# Altium PCB R6.PcbDoc (part 2 of 2)
Units mm, origin at the board's own origin, x right, y up, seen from the top; angles counter-clockwise.
Board outline 152.4 x 101.6 mm, 4 copper layers (Top Layer, GND, VDD, Bottom Layer), stack 0.925 mm thick; 92 components, 126 nets, 416 pads, 248 vias.
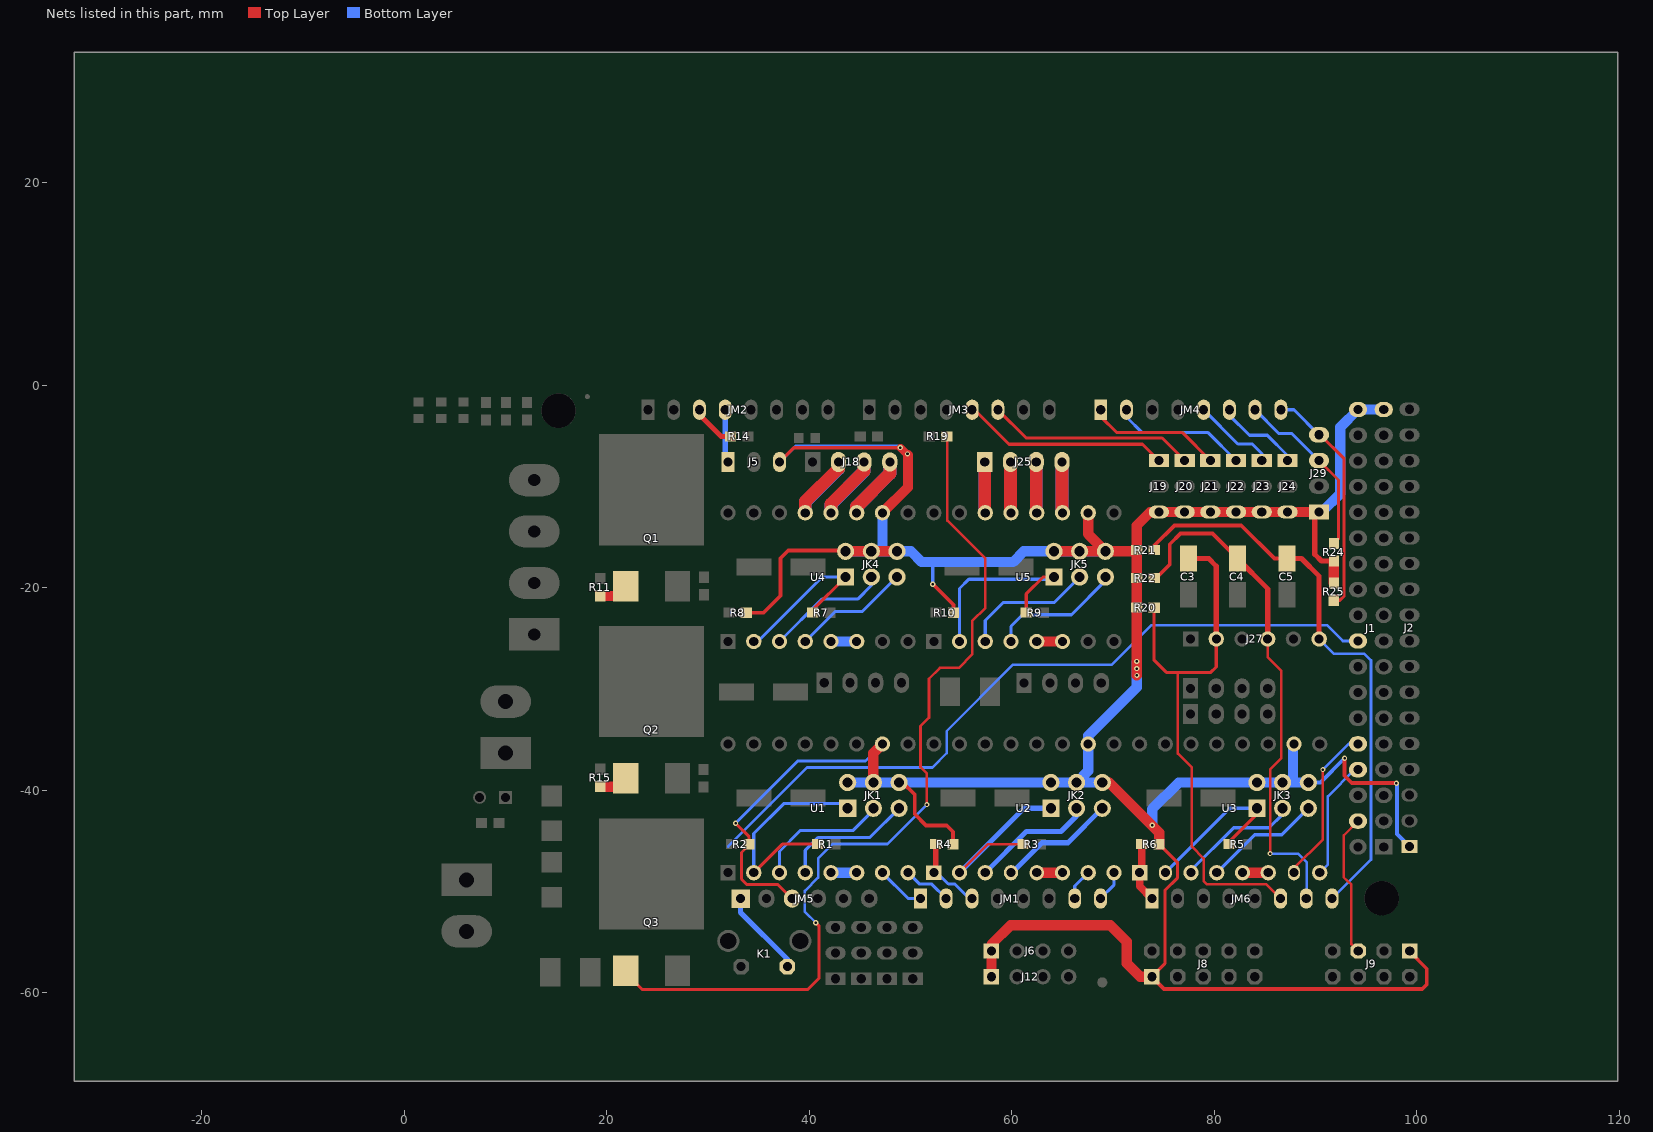
[diagram p4: the nets of this part, all layers, seen from the top]

## Via types
v1: diameter 0.508, hole 0.254, Top Layer to Bottom Layer, 152 vias
v2: diameter 1.016, hole 0.508, Top Layer to Bottom Layer, 96 vias

## Nets (pads, with @x,y where several pads share a name; then routed paths per layer and width w, separated by ;. In a path a pad name is that pad's centre, name@x,y a point inside that pad or via, vN(x,y) a via of type N, cw(c..) or ccw(c..) an arc to the next point about the centre after c; other vN are vias at no path point) (continued)
NetJ18_2: J18.2 U4.13 | length 12.7
  Top Layer w1.27: U4.13@39.601,-12.612 39.601,-11.502 42.875,-8.228 J18.2@42.875,-7.595
  Bottom Layer w1.27: U4.13@39.601,-12.612 39.601,-11.555 42.875,-8.28 J18.2@42.875,-7.595
NetJ18_3: J18.3 U4.12 | length 12.7
  Top Layer w1.27: U4.12@42.141,-12.612 42.141,-11.749 45.415,-8.475 J18.3@45.415,-7.595
  Bottom Layer w1.27: U4.12@42.141,-12.612 42.141,-11.783 45.415,-8.509 J18.3@45.415,-7.595
NetJ18_4: J18.4 U4.11 | length 12.7
  Top Layer w1.27: U4.11@44.681,-12.612 44.681,-12.006 47.955,-8.732 J18.4@47.955,-7.595
  Bottom Layer w1.27: U4.11@44.681,-12.612 44.681,-12.012 47.955,-8.738 J18.4@47.955,-7.595
NetJ25_1: J25.1 U5.14 | length 10.1
  Top Layer w1.27: J25.1@57.328,-7.595 57.328,-12.559 U5.14@57.381,-12.612
  Bottom Layer w1.27: J25.1@57.328,-7.595 57.328,-12.559 U5.14@57.381,-12.612
NetJ25_2: J25.2 U5.13 | length 10.1
  Top Layer w1.27: J25.2@59.868,-7.595 59.868,-12.559 U5.13@59.921,-12.612
  Bottom Layer w1.27: J25.2@59.868,-7.595 59.868,-12.559 U5.13@59.921,-12.612
NetJ25_3: J25.3 U5.12 | length 10.1
  Top Layer w1.27: J25.3@62.408,-7.595 62.408,-12.559 U5.12@62.461,-12.612
  Bottom Layer w1.27: J25.3@62.408,-7.595 62.408,-12.559 U5.12@62.461,-12.612
NetJ25_4: J25.4 U5.11 | length 10.1
  Top Layer w1.27: J25.4@64.948,-7.595 64.948,-12.559 U5.11@65.001,-12.612
  Bottom Layer w1.27: J25.4@64.948,-7.595 64.948,-12.559 U5.11@65.001,-12.612
NetJK1_1: JK1.1 R1.1 U1.2 | length 22
  Top Layer w0.305: U1.2@34.521,-48.147 37.339,-45.329 R1.1@40.8,-45.329
  Bottom Layer w0.305: U1.2@34.521,-48.147 34.521,-44.276 37.471,-41.326 43.327,-41.326 JK1.1@43.79,-41.788
NetJK1_3: JK1.3 U1.3 | length 13.2
  Bottom Layer w0.305: U1.3@37.061,-48.147 37.061,-46.047 39.141,-43.967 44.348,-43.967 46.33,-41.986 JK1.3@46.33,-41.788
NetJK1_5: JK1.5 U1.4 | length 13.2
  Bottom Layer w0.305: U1.4@39.601,-48.147 39.601,-45.946 40.894,-44.653 46.004,-44.653 JK1.5@48.87,-41.788
NetJK2_1: JK2.1 R3.1 U2.2 | length 19.1
  Top Layer w0.254: U2.2@54.841,-48.147 57.659,-45.329 R3.1@61.12,-45.329
  Bottom Layer w0.508: U2.2@54.841,-48.147 61.2,-41.788 JK2.1@63.856,-41.788
NetJK2_3: JK2.3 U2.3 | length 12.1
  Bottom Layer w0.508: U2.3@57.381,-48.147 61.433,-44.094 64.85,-44.094 66.396,-42.549 JK2.3@66.396,-41.788
NetJK2_5: JK2.5 U2.4 | length 11.6
  Bottom Layer w0.508: U2.4@59.921,-48.147 60.007,-48.147 62.968,-45.187 65.537,-45.187 JK2.5@68.936,-41.788
NetJK3_1: JK3.1 R5.1 U3.2 | length 16.4
  Top Layer w0.305: R5.1@81.44,-45.329 81.483,-45.285 81.483,-45.085 84.201,-42.367 JK3.1@84.201,-41.788
  Bottom Layer w0.305: U3.2@75.161,-48.147 81.52,-41.788 JK3.1@84.201,-41.788
NetJK3_3: JK3.3 U3.3 | length 12.2
  Bottom Layer w0.305: U3.3@77.701,-48.147 77.701,-47.911 81.898,-43.713 85.395,-43.713 86.741,-42.367 JK3.3@86.741,-41.788
NetJK3_5: JK3.5 U3.4 | length 11.7
  Bottom Layer w0.305: U3.4@80.241,-48.147 83.989,-44.399 86.67,-44.399 JK3.5@89.281,-41.788
NetJK4_1: JK4.1 R7.1 U4.2 | length 16.9
  Top Layer w0.305: U4.2@34.521,-25.312 U4.2@34.521,-24.997 ; R7.1@40.342,-22.469 40.342,-22.197 JK4.1@43.586,-18.953
  Bottom Layer w0.305: U4.2@34.521,-25.312 34.915,-25.312 41.274,-18.953 JK4.1@43.586,-18.953
NetJK4_3: JK4.3 U4.3 | length 12.2
  Bottom Layer w0.305: U4.3@37.061,-25.312 41.24,-21.133 44.78,-21.133 46.126,-19.787 JK4.3@46.126,-18.953
NetJK4_5: JK4.5 U4.4 | length 12
  Bottom Layer w0.305: U4.4@39.601,-25.312 42.561,-22.352 45.237,-22.352 48.636,-18.953 JK4.5@48.666,-18.953
  Bottom Layer w0.508: U4.4@39.601,-25.312 U4.4@39.601,-25.017
NetJK5_1: JK5.1 R9.1 U5.2 | length 20.3
  Top Layer w0.305: R9.1@61.424,-22.469 61.424,-20.618 63.089,-18.953 JK5.1@64.16,-18.953
  Bottom Layer w0.305: U5.2@54.841,-25.312 54.841,-20.089 55.758,-19.172 63.942,-19.172 JK5.1@64.16,-18.953
NetJK5_3: JK5.3 U5.3 | length 13.2
  Bottom Layer w0.305: U5.3@57.381,-25.312 57.381,-23.239 59.157,-21.463 64.191,-21.463 JK5.3@66.7,-18.953
NetJK5_5: JK5.5 U5.4 | length 13
  Bottom Layer w0.305: U5.4@59.921,-25.312 59.921,-23.823 61.062,-22.682 65.888,-22.682 69.24,-19.329 JK5.5@69.24,-18.953
NetJM2_3: JM2.3 R14.1 | length 4.4
  Top Layer w0.508: JM2.3@29.159,-2.438 29.159,-2.921 31.31,-5.071 R14.1@32.214,-5.071
NetQ1_G: Q1.G R11.2 | length 2.9
  Top Layer w0.508: Q1.G@20.935,-20.828 Q1.G@21.882,-19.881
  Top Layer w1.016: R11.2@19.355,-20.828 Q1.G@20.935,-20.828
NetQ2_G: Q2.G R15.2 | length 2.9
  Top Layer w0.508: Q2.G@21.062,-39.649 Q2.G@21.882,-38.829
  Top Layer w1.016: R15.2@19.355,-39.649 Q2.G@21.062,-39.649
NetQ3_G: Q3.G R19.2 | length 88.7
  Top Layer w0.254: Q3.G@21.882,-57.828 Q3.G@21.882,-57.417 ; 50.986,-33.681 51.825,-32.842 51.825,-28.998 52.908,-27.915 54.762,-27.915 56.083,-26.594 56.083,-23.317 57.398,-22.003 57.398,-17.137 53.636,-13.375 53.636,-5.149 R19.2@53.569,-5.081 ; 50.986,-33.682 50.986,-37.733 51.619,-38.366 v1(51.619,-41.421)
  Top Layer w0.305: Q3.G@21.882,-57.828 21.882,-58.06 23.512,-59.69 39.853,-59.69 40.945,-58.598 40.945,-53.391 v1(40.64,-53.086)
  Bottom Layer w0.254: v1(40.64,-53.086) 39.573,-52.019 39.573,-49.936 40.869,-48.641 40.869,-46.736 42.291,-45.314 47.727,-45.314 v1(51.619,-41.421)
NetU1_5: U1.5 U1.6 | length 2.5
  Bottom Layer w1.016: U1.5@42.141,-48.147 U1.6@44.681,-48.147
NetU2_5: U2.5 U2.6 | length 2.5
  Top Layer w1.016: U2.5@62.461,-48.147 U2.6@65.001,-48.147
NetU3_5: U3.5 U3.6 | length 2.5
  Top Layer w1.016: U3.5@82.781,-48.147 U3.6@85.321,-48.147
NetU4_5: U4.5 U4.6 | length 2.5
  Bottom Layer w1.016: U4.5@42.141,-25.312 U4.6@44.681,-25.312
NetU5_5: U5.5 U5.6 | length 2.5
  Top Layer w1.016: U5.5@62.461,-25.312 U5.6@65.001,-25.312
PS-ON: J5.1 JM2.4 | length 5.3
  Bottom Layer w0.508: JM2.4@31.699,-2.438 31.699,-7.302 J5.1@31.991,-7.595
RESET: JM5.1 K1.2 | length 8.6
  Bottom Layer w0.508: JM5.1@33.223,-50.711 33.223,-52.078 37.846,-56.701 K1.2@37.846,-57.427
SCK: J1.4 J9.5 | length 14.1
  Top Layer w0.254: J1.4@94.135,-43.053 J1.4@94.183,-43.053 92.775,-44.461 92.775,-48.601 93.126,-48.951 93.143,-48.951 93.523,-49.332 93.523,-55.194 J9.5@94.209,-55.88
SCL: J29.4 JM4.8 R25.1 | length 23
  Top Layer w0.305: J29.4@90.322,-4.902 90.424,-4.902 92.812,-7.29 92.812,-20.828 92.387,-21.253 R25.1@91.786,-21.253
  Bottom Layer w0.305: JM4.8@86.563,-2.438 87.859,-2.438 J29.4@90.322,-4.902
SDA: J29.3 JM4.7 R24.1 | length 17.6
  Top Layer w0.305: J29.3@90.322,-7.442 92.253,-9.373 92.253,-15.206 R24.1@91.806,-15.654
  Bottom Layer w0.305: JM4.7@84.023,-2.438 86.376,-4.791 87.671,-4.791 J29.3@90.322,-7.442
"THE RM0": C3.1 J27.2 JM6.6 R20.1 | length 55
  Top Layer w0.254: 76.403,-28.372 76.403,-36.398 77.77,-37.765 77.77,-45.56 78.939,-46.73 78.939,-48.951 79.286,-49.298 85.137,-49.298 JM6.6@86.538,-50.698
  Top Layer w0.305: R20.1@74.059,-21.981 74.059,-27.171 75.26,-28.372 76.403,-28.372 79.654,-28.372 80.188,-27.838 J27.2@80.188,-25.07
  Top Layer w0.508: C3.1@77.432,-17.135 79.441,-17.135 80.188,-17.882 J27.2@80.188,-25.07
"THE RM1": C4.1 J27.4 JM6.7 R22.1 | length 51.2
  Top Layer w0.254: J27.4@85.268,-25.07 85.268,-26.869 86.589,-28.19 86.589,-36.855 85.508,-37.936 v1(85.508,-46.267)
  Top Layer w0.381: R22.1@74.059,-19.06 74.26,-19.06 75.59,-17.729 75.59,-15.723 76.657,-14.656 79.804,-14.656 C4.1@82.283,-17.135
  Top Layer w0.508: C4.1@82.283,-17.135 85.268,-20.119 J27.4@85.268,-25.07
  Bottom Layer w0.254: v1(85.508,-46.267) 88.265,-46.267 89.129,-47.13 89.129,-50.648 JM6.7@89.078,-50.698
"THE RM2": C5.1 J27.6 JM6.8 R21.1 | length 56.9
  Top Layer w0.381: R21.1@74.059,-16.291 74.059,-15.857 76.048,-13.868 82.658,-13.868 85.924,-17.135 C5.1@87.16,-17.135
  Top Layer w0.508: C5.1@87.16,-17.135 88.61,-17.135 90.348,-18.872 J27.6@90.348,-25.07
  Bottom Layer w0.254: J27.6@90.348,-25.07 91.811,-26.533 94.819,-26.533 95.466,-27.181 95.466,-46.85 JM6.8@91.618,-50.698
VCC: J1.35 J1.36 J2.1 J5.3 J6.1 J8.1 J9.1 J12.1 J19.3 J20.3 J21.3 J22.3 J23.3 J24.3 J29.1 JK1.2 JK1.4 JK1.6 JK2.2 JK2.4 JK2.6 JK3.2 JK3.4 JK3.6 JK4.2 JK4.4 JK4.6 JK5.2 JK5.4 JK5.6 JM5.3 R2.2 R4.2 R6.2 R8.2 R10.2 R20.2 R21.2 R22.2 R24.2 R25.2 U1.10 U2.10 U3.10 U4.10 U5.10 | length 361.6
  Top Layer w0.305: v1(32.722,-43.26) 32.722,-43.274 34.061,-44.613 R2.2@34.061,-45.339 34.061,-45.398 33.304,-46.155 33.304,-48.784 33.828,-49.308 36.9,-49.308 JM5.3@38.303,-50.711 ; J5.3@37.071,-7.595 38.478,-6.188 45.246,-6.188 ; JK1.2@43.683,-39.141 JK1.2@43.79,-39.248 ; 45.246,-6.191 49.004,-6.191 v1@49.102,-6.191 ; J8.1@73.825,-58.42 75.114,-57.131 75.114,-49.903 76.377,-48.64 76.377,-47.167 R6.2@74.549,-45.339
  Top Layer w0.381: R8.2@33.782,-22.479 35.484,-22.479 37.16,-20.803 37.16,-17.094 37.922,-16.332 43.505,-16.332 JK4.2@43.586,-16.413 ; JK1.6@48.87,-39.245 JK1.6@48.87,-39.248 49.223,-39.248 50.415,-40.441 50.415,-42.357 51.54,-43.482 53.579,-43.482 54.204,-44.107 R4.2@54.204,-45.339 ; v1@52.172,-19.634 v1(52.197,-19.66) 54.229,-21.692 R10.2@54.229,-22.479 ; J8.1@73.825,-58.42 75.044,-59.639 100.533,-59.639 100.974,-59.198 100.974,-57.63 99.289,-55.944 J9.1@99.289,-55.88 ; v1(92.868,-36.846) 92.839,-36.875 92.839,-38.582 93.563,-39.306 97.964,-39.306 v1(97.971,-39.314)
  Top Layer w0.508: v1(48.985,-6.172) v1@49.004,-6.191 ; J29.1@90.322,-12.522 90.31,-12.535 89.916,-12.929 89.916,-16.713 90.576,-17.374 R24.2@91.796,-17.374
  Top Layer w0.762: v1@49.004,-6.191 v1@49.751,-6.938
  Top Layer w1.016: JK4.2@43.586,-16.413 JK4.4@46.126,-16.413 JK4.6@48.666,-16.413 ; JK1.4@46.33,-39.248 46.33,-36.338 U1.10@47.221,-35.447 ; U4.10@47.221,-12.612 49.751,-10.083 v1@49.751,-6.938 ; J12.1@57.988,-58.42 J6.1@57.988,-55.88 57.988,-55.235 59.875,-53.348 69.73,-53.348 71.359,-54.978 71.359,-57.085 72.694,-58.42 J8.1@73.825,-58.42 ; JK5.2@64.16,-16.413 JK5.4@66.7,-16.413 JK5.6@69.24,-16.413 ; U5.10@67.541,-12.612 67.541,-14.714 JK5.6@69.24,-16.413 ; JK2.6@68.936,-39.248 69.609,-39.248 74.549,-44.188 R6.2@74.549,-45.339 ; v1(72.345,-28.671) 72.339,-28.665 v1(72.339,-27.28) R20.2@72.339,-21.971 R22.2@72.339,-19.05 R21.2@72.339,-16.281 ; J29.1@90.31,-12.535 J24.3@87.224,-12.535 J23.3@84.684,-12.535 J22.3@82.144,-12.535 J21.3@79.604,-12.535 J20.3@77.064,-12.535 J19.3@74.524,-12.535 73.673,-12.535 72.339,-13.868 R21.2@72.339,-16.281 ; R25.2@91.796,-19.533 R24.2@91.796,-17.374 ; JK5.6@69.24,-16.413 72.207,-16.413 R21.2@72.339,-16.281
  Bottom Layer w0.305: v1(32.722,-43.26) 38.863,-37.119 45.549,-37.119 U1.10@47.221,-35.447 ; J5.3@37.071,-7.595 38.657,-6.009 48.741,-6.009 v1@48.927,-6.195 ; v1(48.985,-6.172) 48.985,-6.204 v1@49.529,-6.748
  Bottom Layer w0.381: 52.172,-17.475 52.197,-17.501 v1(52.197,-19.66) ; JK3.6@89.281,-39.248 90.466,-39.248 v1(92.868,-36.846) ; v1(97.971,-39.314) 98.018,-39.36 98.018,-44.322 J2.1@99.263,-45.568
  Bottom Layer w0.508: J29.1@90.322,-12.522 90.322,-12.536 J29.1@90.37,-12.584
  Bottom Layer w1.016: JK4.2@43.586,-16.413 JK4.4@46.126,-16.413 47.219,-16.413 ; JK1.2@43.79,-39.248 JK1.4@46.33,-39.248 JK1.6@48.87,-39.248 JK2.2@63.856,-39.248 JK2.4@66.396,-39.248 ; U4.10@47.221,-12.612 47.221,-16.411 47.219,-16.413 ; JK2.6@68.936,-39.248 JK2.4@66.396,-39.248 ; JK5.6@69.24,-16.413 JK5.4@66.7,-16.413 JK5.2@64.16,-16.413 61.189,-16.413 60.127,-17.475 52.172,-17.475 51.105,-17.475 50.043,-16.413 JK4.6@48.666,-16.413 47.219,-16.413 ; v1@72.339,-27.356 72.339,-29.838 67.541,-34.636 U2.10@67.541,-35.447 67.541,-38.103 JK2.4@66.396,-39.248 ; v1(73.873,-43.465) 73.873,-41.852 76.477,-39.248 JK3.2@84.201,-39.248 JK3.4@86.741,-39.248 87.774,-39.248 ; U3.10@87.861,-35.447 87.774,-35.534 87.774,-39.248 ; JK3.6@89.281,-39.248 87.774,-39.248 ; J29.1@90.322,-12.522 90.629,-12.522 92.438,-10.713 92.438,-4.159 J1.36@94.183,-2.413 J1.35@96.723,-2.413
  other v1: 72.338,-27.991 49.696,-6.794
X-DIR: JM1.2 U1.8 | length 4.8
  Bottom Layer w0.305: U1.8@49.761,-48.147 50.897,-49.283 52.102,-49.283 JM1.2@53.518,-50.698
X-EN: J1.18 | length 73.2
  Bottom Layer w0.254: 31.981,-45.562 39.785,-37.758 52.163,-37.758 53.575,-36.346 53.575,-34.167 60.132,-27.61 69.875,-27.61 73.787,-23.698 91.11,-23.698 92.685,-25.273 J1.18@94.183,-25.273
X-MAX: J20.1 JM3.6 | length 20.5
  Top Layer w0.305: JM3.6@58.623,-2.438 61.417,-5.232 74.841,-5.232 J20.1@77.064,-7.455
X-MIN: J19.1 JM3.5 | length 20.5
  Top Layer w0.305: JM3.5@56.083,-2.438 56.312,-2.438 59.715,-5.842 72.911,-5.842 J19.1@74.524,-7.455
X-STEP: JM1.1 U1.7 | length 4.8
  Bottom Layer w0.305: U1.7@47.221,-48.147 49.773,-50.698 JM1.1@50.978,-50.698
Y-DIR: JM1.8 U2.8 | length 3.1
  Bottom Layer w0.305: JM1.8@68.758,-50.698 70.081,-49.375 U2.8@70.081,-48.147
Y-EN: JM1.3 R4.1 U2.1 | length 7.7
  Top Layer w0.508: U2.1@52.301,-48.147 52.484,-47.964 R4.1@52.484,-45.329
  Bottom Layer w0.305: U2.1@52.301,-48.147 52.62,-48.147 53.731,-49.257 54.363,-49.257 55.804,-50.698 JM1.3@56.058,-50.698
Y-MAX: J22.1 JM4.2 | length 13.3
  Bottom Layer w0.305: JM4.2@71.323,-2.438 71.323,-3.15 72.873,-4.699 79.388,-4.699 J22.1@82.144,-7.455
Y-MIN: J21.1 JM4.1 | length 13.3
  Top Layer w0.305: JM4.1@68.783,-2.438 68.783,-3.124 70.333,-4.674 76.822,-4.674 J21.1@79.604,-7.455
Y-STEP: JM1.7 U2.7 | length 3.1
  Bottom Layer w0.305: JM1.7@66.218,-50.698 66.218,-49.47 U2.7@67.541,-48.147
Z-DIR: J1.8 U3.8 | length 12.3
  Top Layer w0.254: U3.8@90.401,-48.147 U3.8@90.401,-47.8
  Bottom Layer w0.254: U3.8@90.401,-48.147 91.21,-47.337 91.21,-40.623 93.86,-37.973 J1.8@94.183,-37.973
Z-EN: JM6.1 R6.1 U3.1 | length 6
  Top Layer w0.762: R6.1@72.829,-45.329 72.829,-47.939 U3.1@72.621,-48.147 72.621,-49.482 JM6.1@73.838,-50.698
Z-MAX: J24.1 JM4.6 | length 8.4
  Bottom Layer w0.305: JM4.6@81.483,-2.438 81.483,-2.972 83.467,-4.955 85.219,-4.955 87.224,-6.96 J24.1@87.224,-7.455
Z-MIN: J23.1 JM4.5 | length 8.2
  Bottom Layer w0.305: JM4.5@78.943,-2.438 82.321,-5.817 83.744,-5.817 84.684,-6.756 J23.1@84.684,-7.455
Z-STEP: J1.10 U3.7 | length 15.9
  Top Layer w0.254: U3.7@87.861,-48.147 87.861,-47.699 90.711,-44.849 v1(90.711,-37.974)
  Bottom Layer w0.254: v1(90.711,-37.974) 93.252,-35.433 J1.10@94.183,-35.433
pads on no net: J1.34 J9.8 JM2.1 JM2.2 JM3.1 JM5.2 R2.1 U1.1

## Polygon pours and split planes (outlines as drawn)
GND on Top Layer "TOP  Layer-GND" (hatched 45Degree grid 0.33 track 0.203, remove dead copper, pour order 4): 0,0.013 101.6,0.013 101.6,-60.116 101.728,-60.244 101.638,-60.334 -0.209,-60.334
GND on Bottom Layer " BOTTOM   Layer-GND" (hatched 45Degree grid 0.33 track 0.203, remove dead copper, pour order 6): 0.056,-0.033 0.176,0.087 101.643,0.087 101.612,0.056 101.612,-59.96 101.6,-59.972 101.6,-60.185 101.53,-60.115 -0.051,-60.115
GND on GND (split plane): 100.946,-59.564 0.601,-59.564 0.601,-0.586 100.946,-0.586
GND on GND (split plane): 119.317,-68.23 -32.063,-68.23 -32.063,32.35 119.317,32.35
NetD4_2 on VDD (split plane): 29.978,-17.536 29.978,-35.237 29.696,-34.954 29.643,-34.913 29.581,-34.888 29.515,-34.879 19.488,-34.879 19.488,-28.178 19.494,-28.128 19.485,-28.062 19.46,-28 19.419,-27.947 19.366,-27.907 19.304,-27.881 19.238,-27.872 18.039,-27.872 18.039,-21.993 18.031,-21.926 18.005,-21.865 17.964,-21.812 17.911,-21.771 17.849,-21.745 17.783,-21.736 15.191,-21.736 15.147,-21.731 8.426,-21.731 8.426,-17.47 17.438,-17.47 17.505,-17.461 17.507,-17.461 29.903,-17.461
NetD3_2 on VDD (split plane): 29.978,-16.948 17.46,-16.948 17.46,-11.885 17.452,-11.818 17.444,-11.8 17.426,-11.757 17.385,-11.704 17.338,-11.657 17.285,-11.616 17.223,-11.59 17.157,-11.581 16.418,-11.581 16.403,-11.579 8.506,-11.579 8.506,-6.75 19.025,-6.75 19.092,-6.741 19.154,-6.716 19.207,-6.675 20.832,-5.049 29.978,-5.049
NetD6_2 on VDD (split plane): 18.975,-35.056 18.984,-35.122 19.01,-35.184 19.05,-35.237 19.129,-35.317 19.182,-35.357 19.244,-35.383 19.311,-35.392 29.408,-35.392 31.555,-37.538 31.555,-45.011 30.737,-45.829 30.696,-45.883 30.67,-45.944 30.662,-46.011 30.662,-50.1 30.662,-51.597 29.32,-52.939 28.124,-54.135 17.325,-54.135 16.84,-53.649 16,-52.809 16,-44.129 15.991,-44.062 15.983,-44.044 15.965,-44.001 15.925,-43.947 13.386,-41.409 13.386,-34.572 13.386,-34.535 13.377,-34.468 13.352,-34.407 13.311,-34.354 13.258,-34.313 13.196,-34.287 13.13,-34.279 6.366,-34.279 6.366,-28.385 18.975,-28.385
+12V on VDD (split plane): 101.013,-59.56 0.62,-59.56 0.62,-52.627 3.286,-52.627 3.286,-55.776 8.86,-55.776 8.86,-52.627 10.576,-52.627 10.642,-52.619 10.704,-52.593 10.757,-52.552 10.798,-52.499 10.823,-52.438 10.832,-52.371 10.832,-51.64 10.826,-51.597 10.826,-46.199 10.826,-45.551 10.817,-45.485 10.792,-45.423 10.751,-45.37 10.698,-45.329 10.636,-45.303 10.57,-45.295 0.62,-45.295 0.62,-0.586 101.013,-0.586
NetF1_2 on VDD (split plane): 10.314,-46.199 10.314,-51.635 10.32,-51.678 10.32,-52.115 0.631,-52.115 0.62,-52.104 0.62,-46.079 0.624,-46.074 0.65,-46.012 0.658,-45.946 0.658,-45.807 10.314,-45.807
+12V on VDD (split plane): 119.317,-68.23 -32.063,-68.23 -32.063,32.35 119.317,32.35

## Keep-outs
Keep-Out Layer:
  lines w0.203: 0,-60.185 0,0.013 101.6,0.013 101.6,-60.185 0,-60.185

## Other copper
Top Layer:
  rectangle net GND: 27.83,-59.228 34.302,-56.452
  rectangle net GND: 23.42,-58.781 27.008,-55.725
  rectangle net GND: 24.443,-37.069 25.088,-36.833
  rectangle net GND: 27.253,-42.227 30.166,-40.549
  rectangle net GND: 23.494,-42.229 28.626,-36.821
  rectangle net GND: 27.852,-23.342 29.747,-21.498
  rectangle net GND: 23.43,-23.279 28.184,-17.954
  rectangle net GND: 24.933,-22.86 28.499,-17.958
  rectangle net GND: 28.092,-22.631 28.793,-19.761
  rectangle net GND: 24.933,-41.758 28.397,-36.833
  rectangle net GND: 28.219,-38.76 28.603,-37.084
  rectangle net GND: 23.882,-59.216 30.013,-55.728
  rectangle net GND: 29.474,-58.91 30.86,-56.474
  rectangle net GND: 30.582,-58.918 32.122,-56.73
  rectangle net NetD3_2: 5.629,-12.074 24.557,-5.666
  rectangle net NetD6_2: 16.467,-53.777 25.743,-42.769
  rectangle net +12V2: 10.997,-41.645 15.742,-34.013
  rectangle net +12V2: 0.827,-39.297 15.729,-33.327
  rectangle net NetF1_2: 11.522,-48.539 15.729,-42.334
  rectangle net NetF1_2: 4.352,-48.539 13.263,-44.133
  rectangle net NetF1_2: 0.413,-51.402 10.556,-44.113
  rectangle net +12V: 10.944,-55.152 15.714,-49.45
  rectangle net NetF1_2: 7.474,-49.156 15.726,-47.208
  rectangle net +12V: 3.4,-27.729 15.889,-22.837
  rectangle net NetD4_2: 3.671,-22.314 15.874,-17.076
  rectangle net +12V: 5.67,-16.703 17.149,-12.544
  rectangle net NetD6_2: 3.494,-32.902 18.486,-28.122
  rectangle net NetF1_2: 0.381,-44.606 5.651,-39.985
  rectangle net GND: 0.43,-59.799 10.515,-51.77
  rectangle net +12V: 13.615,-57.446 15.256,-54.837
  rectangle net GND: 9.968,-59.819 12.762,-55.607
  rectangle net NetD3_2: 17.956,-15.831 19.862,-4.826
Bottom Layer:
  rectangle net GND: 6.203,-41.737 8.997,-40.705
  rectangle net GND: 23.381,-59.77 34.435,-56.751
  rectangle net GND: 23.222,-21.811 25.717,-18.005
  rectangle net NetD6_2: 26.076,-40.184 29.822,-35.485
  rectangle net GND: 23.598,-39.578 25.855,-35.509
  rectangle net NetD6_2: 17.401,-42.985 29.827,-39.715
  rectangle net NetD6_2: 17.701,-41.559 23.41,-35.468
  rectangle net GND: 0.502,-59.825 10.414,-51.845
  rectangle net NetF1_2: 0.47,-51.469 10.414,-46.987
  rectangle net +12V2: 11.001,-41.646 15.725,-38.961
  rectangle net +12V2: 5.931,-39.387 15.725,-33.326
  rectangle net +12V: 11.022,-55.253 15.414,-46.988
  rectangle net NetD6_2: 15.812,-56.501 29.814,-41.956
  rectangle net NetD3_2: 18.01,-17.048 29.603,-4.852
  rectangle net NetD3_2: 0.733,-12.09 22.38,-5.439
  rectangle net NetD4_2: 19.31,-35.065 29.747,-23.499
  rectangle net NetD6_2: 0.489,-32.899 18.7,-27.192
  rectangle net NetD6_2: 0.49,-46.721 5.687,-27.883
  rectangle net NetD6_2: 5.613,-46.721 17.438,-42.007
  rectangle net +12V: 2.788,-16.939 17.208,-12.583
  rectangle net +12V: 0.682,-26.905 8.144,-12.602
  rectangle net +12V: 6.829,-26.925 15.787,-22.609
  rectangle net NetD4_2: 8.391,-22.326 17.143,-17.139
  rectangle net GND: 10.038,-59.829 12.763,-55.623
  rectangle net NetD6_2: 15.812,-59.806 23.05,-56.501
  rectangle net NetD6_2: 13.372,-59.811 16.708,-55.63
GND (plane layer: these items are gaps in the copper):
  rectangle: 9.479,-27.08 16.156,-7.143
  rectangle: 6.639,-38.55 13.307,-28.998
  rectangle: 3,-51.242 9.645,-46.77
  lines w0.508: 0.327,-0.335 0.344,-0.335 0.35,-0.329 101.197,-0.329 101.203,-0.335 101.203,-59.817 101.206,-59.82 0.352,-59.82 0.344,-59.812 0.344,-0.352
VDD (plane layer: these items are gaps in the copper):
  rectangle: 3.286,-55.776 8.86,-52.136
  lines w0.508: 0.402,-45.946 0.402,-45.551 10.57,-45.551 10.57,-46.199 10.57,-51.635 10.576,-51.64 10.576,-52.371 0.525,-52.371 0.421,-52.267 ; 8.25,-6.498 8.25,-11.732 8.354,-11.836 16.403,-11.836 16.405,-11.838 17.157,-11.838 17.204,-11.885 17.204,-17.181 ; 8.255,-6.494 19.025,-6.494 20.726,-4.793 30.234,-4.793 30.234,-4.894 30.234,-17.43 ; 17.401,-17.214 17.411,-17.204 30.009,-17.204 30.234,-17.43 ; 17.438,-17.214 8.146,-17.214 8.17,-17.238 8.17,-21.987 8.17,-21.987 15.147,-21.987 15.153,-21.993 17.783,-21.993 17.783,-28.03 ; 30.234,-35.823 30.234,-17.43 ; 0.364,-59.841 0.389,-59.816 101.265,-59.816 101.269,-59.812 101.269,-0.34 101.258,-0.33 0.38,-0.33 0.364,-0.347 0.364,-59.841 ; 6.11,-34.548 6.11,-28.215 6.197,-28.128 19.238,-28.128 19.231,-28.135 19.231,-35.056 19.311,-35.135 29.515,-35.135 31.811,-37.432 31.811,-45.117 30.918,-46.011 30.918,-50.1 30.918,-51.703 29.501,-53.12 28.23,-54.391 25.218,-54.391 21.144,-54.391 17.219,-54.391 16.658,-53.83 15.743,-52.915 15.743,-44.129 13.13,-41.515 13.13,-34.572 13.13,-34.535 6.124,-34.535 6.11,-34.548

## Silkscreen, mask and mechanical layers (free items; w line width, h text height)
Top Overlay:
  circle w0.254: c96.52,-50.66 r1.889
  circle w0.254: c15.24,-2.527 r1.963
  rectangle: 43.501,-58.919 49.244,-58.31
  rectangle: 43.495,-56.429 49.256,-55.768
  rectangle: 0.039,-28.303 16.758,-27.327
  rectangle: 0.039,-27.328 0.272,-27.164
  lines w0.127: 0.889,-4.394 1.93,-4.394 ; 3.175,-4.394 4.216,-4.394 ; 5.41,-4.394 6.452,-4.394 ; 32.106,-6.274 32.156,-6.325 ; 35.23,-6.325 35.23,-6.045 ; 37.008,-6.375 37.008,-6.045 ; 39.249,-10.737 40.148,-10.737 40.369,-10.958 40.369,-11.698 ; 46.022,-33.428 46.099,-33.506 47.284,-33.506 47.609,-33.831 ; 61.5,-34.564 61.5,-33.88 61.842,-33.539 63.445,-33.539 63.474,-33.568 ; 63.977,-11.138 64.339,-10.776 65.427,-10.776 ; 87.577,-34.5 87.592,-34.484
  lines w0.203: 0.17,-6.909 0.17,-28.16 0.194,-28.184 ; 0.254,-38.738 9.037,-38.738 ; 0.359,-38.735 0.119,-38.735 0.119,-28.865 0.246,-28.739 9.04,-28.739 ; 40.691,-60.046 40.691,-51.994 ; 51.994,-58.674 52.781,-58.674 ; 54.559,-60.02 54.559,-52.019 ; 59.995,-53.975 60.935,-53.975 ; 70.002,-60.02 70.028,-59.995 70.028,-51.968 ; 71.907,-9.957 72.746,-9.957 ; 81.458,-24.435 81.458,-22.403 ; 86.538,-24.435 86.538,-22.403 ; 89.789,-60.071 89.789,-59.842 89.789,-52.121 ; 91.618,-24.435 91.618,-22.377
  lines w0.254: -5.568,-1.506 -5.06,0.018 ; -5.563,-58.649 -5.055,-60.173 ; -5.314,0.018 -4.806,0.018 ; -5.309,-60.173 -4.801,-60.173 ; -5.057,-37.213 -5.055,-60.173 ; -5.058,-22.942 -5.06,0.018 ; -4.552,-1.506 -5.06,0.018 ; -4.547,-58.649 -5.055,-60.173 ; 0,3.127 0.001,3.635 ; 0.17,-6.909 8.738,-6.909 ; 0.18,-27.29 8.78,-27.29 ; 0.205,-11.405 8.788,-11.405 ; 0.239,-21.59 8.839,-21.59 ; 0.252,-16.535 8.814,-16.535 ; 1.524,2.87 0.001,3.381 ; 1.526,3.886 0.001,3.381 ; 9.119,-16.586 9.169,-16.535 16.662,-16.535 ; 30.721,-6.325 30.721,-4.522 ; 39.249,-10.737 40.148,-10.737 40.369,-10.958 40.369,-11.597 40.371,-11.598 ; 42.273,3.313 0.001,3.381 ; 46.099,-33.506 47.284,-33.506 47.623,-33.845 47.637,-33.859 47.637,-34.449 ; 59.336,3.286 101.608,3.218 ; 61.5,-34.47 61.5,-33.88 61.842,-33.539 63.551,-33.539 63.569,-33.52 ; 63.977,-11.589 63.977,-11.138 ; 63.995,-11.589 63.995,-11.12 64.339,-10.776 65.427,-10.776 ; 73.254,-6.185 73.254,-4.14 88.494,-4.14 88.494,-6.185 ; 75.794,-6.185 75.794,-4.14 ; 78.334,-6.274 78.334,-4.166 ; 80.823,-4.14 80.874,-4.191 80.874,-6.185 ; 83.414,-6.185 83.414,-4.191 83.439,-4.166 ; 85.954,-6.185 85.954,-4.14 ; 87.592,-34.484 87.592,-34.483 ; 89.052,-3.632 88.592,-3.172 88.592,-1.171 92.195,-1.171 92.195,-3.073 91.595,-3.673 91.592,-3.673 ; 91.999,-9.957 92.507,-9.957 ; 99.898,-47.422 99.898,-46.914 ; 100.084,2.713 101.608,3.218 ; 100.085,3.729 101.608,3.218 ; 101.608,2.964 101.609,3.472
  lines w0.508: 0.593,-57.793 2.079,-57.791
  text "BQ105-A4" at 29.108,17.494 h10
  text "RAMPS 1.6" at 23.379,7.619 h6
  text "101.608 (mm)" at 42.525,2.398 h1.52 r359.91
  text "PS-ON" at 29.589,-4.373 h0.8
  text "SCL" at 92.558,-5.613 h1 r90
  text "5V" at 34.823,-6.045 h0.8
  text "VCC" at 36.551,-6.045 h0.8
  text "S" at 71.78,-8.128 h2
  text "SDA" at 92.558,-8.458 h1 r90
  text "2B" at 39.624,-10.211 h1.5
  text "2A" at 42.113,-10.211 h1.5
  text "1A" at 44.628,-10.211 h1.5
  text "1B" at 47.219,-10.211 h1.5
  text "2B" at 56.439,-10.211 h1.5
  text "2A" at 58.826,-10.211 h1.5
  text "1A" at 61.265,-10.211 h1.5
  text "1B" at 63.5,-10.211 h1.5
  text "D10" at 1.177,-10.424 h4
  text "【E0】" at 33.871,-11.118 h2.5
  text "【E1】" at 65.768,-11.112 h2.5
  text "+" at 91.897,-12.939 h1.5
  text "+" at 71.882,-13.183 h2
  text "Vmot" at 31.191,-14.673 h1
  text "VDD" at 46.348,-14.673 h1
  text "Vmot" at 51.46,-14.673 h1
  text "VDD" at 66.531,-14.673 h1
  text "GND" at 48.797,-14.685 h1
  text "GND" at 69.06,-14.685 h1
  text "+" at 2.232,-15.672 h6
  text "D9" at 0.684,-20.779 h4
  text "60.19 (mm)" at -5.972,-23.196 h1.52 r270
  text "T0" at 78.842,-23.444 h1.5
  text "T1" at 83.287,-23.444 h1.5
  text "T2" at 88.367,-23.444 h1.5
  text "STEP" at 46.304,-23.864 h1
  text "STEP" at 66.551,-23.864 h1
  text "EN" at 31.42,-23.876 h1
  text "DIP" at 49.258,-23.876 h1
  text "EN" at 51.765,-23.876 h1
  text "DIP" at 69.418,-23.876 h1
  text "+" at 2.232,-25.933 h6
  text "2B" at 40.691,-27.788 h1.5
  text "2A" at 43.307,-27.788 h1.5
  text "1A" at 45.618,-27.788 h1.5
  text "1B" at 48.26,-27.788 h1.5
  text "2B" at 60.376,-27.788 h1.5
  text "2A" at 62.967,-27.788 h1.5
  text "1A" at 65.354,-27.788 h1.5
  text "1B" at 68.047,-27.788 h1.5
  text "2B" at 76.835,-28.245 h1.5
  text "2A" at 79.324,-28.245 h1.5
  text "1A" at 81.864,-28.245 h1.5
  text "1B" at 84.43,-28.245 h1.5
  text "D8" at 0.63,-31.815 h2.8
  text "【X】" at 41.239,-33.879 h3
  text "【Y】" at 63.805,-33.884 h3
  text "【Z】" at 87.315,-33.927 h2.6
  text "Vmot" at 31.191,-37.53 h1
  text "VDD" at 46.32,-37.53 h1
  text "Vmot" at 51.562,-37.53 h1
  text "VDD" at 66.595,-37.53 h1
  text "Vmot" at 71.755,-37.53 h1
  text "VDD" at 86.969,-37.53 h1
  text "GND" at 48.756,-37.542 h1
  text "GND" at 69.111,-37.542 h1
  text "GND" at 89.516,-37.542 h1
  text "+" at 0.674,-38.743 h6
  text "+" at 12.861,-41.553 h3
  text "-" at 6.178,-41.978 h3
  text "+" at 0.542,-46.556 h4
  text "STEP" at 46.098,-46.724 h1
  text "STEP" at 66.511,-46.724 h1
  text "STEP" at 86.919,-46.724 h1
  text "EN" at 31.267,-46.736 h1
  text "DIP" at 48.953,-46.736 h1
  text "EN" at 51.689,-46.736 h1
  text "DIP" at 69.42,-46.736 h1
  text "EN" at 72.111,-46.736 h1
  text "DIP" at 89.84,-46.736 h1
  text "AUX-1" at 55.194,-53.315 h1
  text "SERVOS" at 53.307,-53.697 h0.91 r270
  text "S" at 62.484,-54.331 h2
  text "S" at 65.024,-54.331 h2
  text "+" at 57.506,-54.61 h2
  text "+" at 51.892,-56.718 h2
  text "GND" at 67.97,-58.344 h1
  text "POWER" at 2.703,-58.915 h2.6
Bottom Overlay:
  drawing of 2889 lines, arcs and shapes, not listed
  text "HEAT BED" at 1.735,-1.377 h1 r90
  text "FAN" at 3.993,-1.396 h1 r90
  text "36" at 95.093,-1.468 h2
  text "35" at 97.728,-1.468 h2
  text "18" at 100.246,-1.468 h2
  text "SCL" at 92.364,-4.072 h1.2 r90
  text "2B" at 41.204,-6.088 h1.5
  text "2A" at 43.693,-6.088 h1.5
  text "1A" at 46.208,-6.088 h1.5
  text "1B" at 48.799,-6.088 h1.5
  text "2B" at 58.038,-6.088 h1.5
  text "2A" at 60.528,-6.088 h1.5
  text "1A" at 63.042,-6.088 h1.5
  text "1B" at 65.633,-6.088 h1.5
  text "X-" at 75.257,-6.192 h1
  text "X+" at 77.879,-6.192 h1
  text "Y-" at 80.467,-6.192 h1
  text "Y+" at 82.964,-6.192 h1
  text "Z-" at 85.417,-6.192 h1
  text "Z+" at 87.994,-6.192 h1
  text "SDA" at 92.364,-6.598 h1.2 r90
  text "-" at 15.791,-10.615 h2
  text "GND" at 51.078,-10.757 h1
  text "GND" at 71.343,-10.757 h1
  text "+" at 91.572,-13.134 h2
  text "Vmot" at 33.364,-15.244 h1
  text "Vmot" at 53.794,-15.244 h1
  text "+" at 15.819,-15.482 h2
  text "FAN" at 18.286,-18.795 h4 r90
  text "【E0】" at 41.652,-19.332 h4
  text "【E1】" at 62.421,-19.332 h4
  text "EN" at 32.894,-23.397 h1
  text "DIR" at 50.515,-23.401 h1
  text "EN" at 53.294,-23.395 h1
  text "DIR" at 71.608,-23.397 h1
  text "+" at 5.987,-26.741 h4
  text "2B" at 42.451,-27.837 h1.5
  text "2A" at 44.94,-27.837 h1.5
  text "1A" at 47.455,-27.837 h1.5
  text "1B" at 50.046,-27.837 h1.5
  text "2B" at 62.043,-27.837 h1.5
  text "2A" at 64.532,-27.837 h1.5
  text "1A" at 67.047,-27.837 h1.5
  text "1B" at 69.638,-27.837 h1.5
  text "2B" at 78.594,-28.488 h1.5
  text "2A" at 81.083,-28.488 h1.5
  text "1A" at 83.598,-28.488 h1.5
  text "1B" at 86.189,-28.488 h1.5
  text "HEAT BED" at 5.705,-29.29 h2 r90
  text "D8" at 3.715,-32.246 h1.6
  text "GND" at 71.397,-33.642 h1
  text "GND" at 91.641,-33.746 h1
  text "RAMPS 1.6" at 63.261,-34.012 h4
  text "-" at 3.12,-37.356 h2
  text "Vmot" at 33.718,-38.06 h1
  text "GND" at 50.423,-38.06 h1
  text "Vmot" at 54.715,-38.063 h1
  text "Vmot" at 74.45,-38.06 h1
  text "12V" at 13.711,-41.081 h1
  text "-" at 5.148,-41.369 h1.6
  text "【X】" at 42.314,-41.635 h4
  text "【Y】" at 62.381,-41.635 h4
  text "【Z】" at 82.547,-41.635 h4
  text "R" at 35.497,-43.995 h2
  text "DIR" at 92.02,-46.27 h1
  text "2" at 94.67,-48.096 h2
  text "1" at 97.106,-48.096 h2
  text "1" at 99.604,-48.096 h2
  text "12V" at 3.477,-50.007 h1.6
  text "EN" at 31.841,-50.106 h1 r90
  text "DIR" at 70.764,-50.106 h1 r90
  text "EN" at 72.717,-50.106 h1 r90
  text "DIR" at 49.891,-50.778 h1
  text "EN" at 53.28,-53.097 h1
  text "-" at 2.783,-54.98 h3
  text "+" at 51.71,-56.71 h2
Top Solder:
  circle w0.508: c18.085,-1.143 r0.648
Bottom Solder:
  rectangle: 26.232,-40.878 29.568,-35.894
  rectangle: 16.623,-42.418 23.114,-35.928
  rectangle: 1.023,-46.328 18.464,-42.464
  rectangle: 13.73,-59.654 22.83,-56.11
  rectangle: 16.647,-56.167 29.571,-39.995
  rectangle: 19.569,-34.786 29.424,-23.767
  rectangle: 18.358,-16.727 29.406,-5.035

## Text inside footprints (layer, text, board x,y; h text height)
C2: Top Overlay "+" at 31.75,-28.626 h2 r90
C3: Top Overlay "+" at 75.225,-15.773 h2 r270
C4: Top Overlay "+" at 80.076,-15.773 h2 r270
C5: Top Overlay "+" at 84.953,-15.773 h2 r270
C6: Top Overlay "+" at 33.929,-39.19 h2 r90
C7: Top Overlay "+" at 54.046,-39.19 h2 r90
C8: Top Overlay "+" at 74.417,-39.19 h2 r90
C9: Top Overlay "+" at 33.929,-16.355 h2 r90
C10: Top Overlay "+" at 54.453,-16.355 h2 r90
J9: Top Overlay "1" at 99.619,-54.178 h1